# Altium PCB PCB_1.PcbDoc
Units mm, origin at the board's own origin, x right, y up, seen from the top; angles counter-clockwise.
Board outline 96.52 x 53.34 mm, 2 copper layers (Top Layer, Bottom Layer); 47 components, 44 nets, 157 pads, 56 vias.
Unrouted connection lines stored in the file: 1.
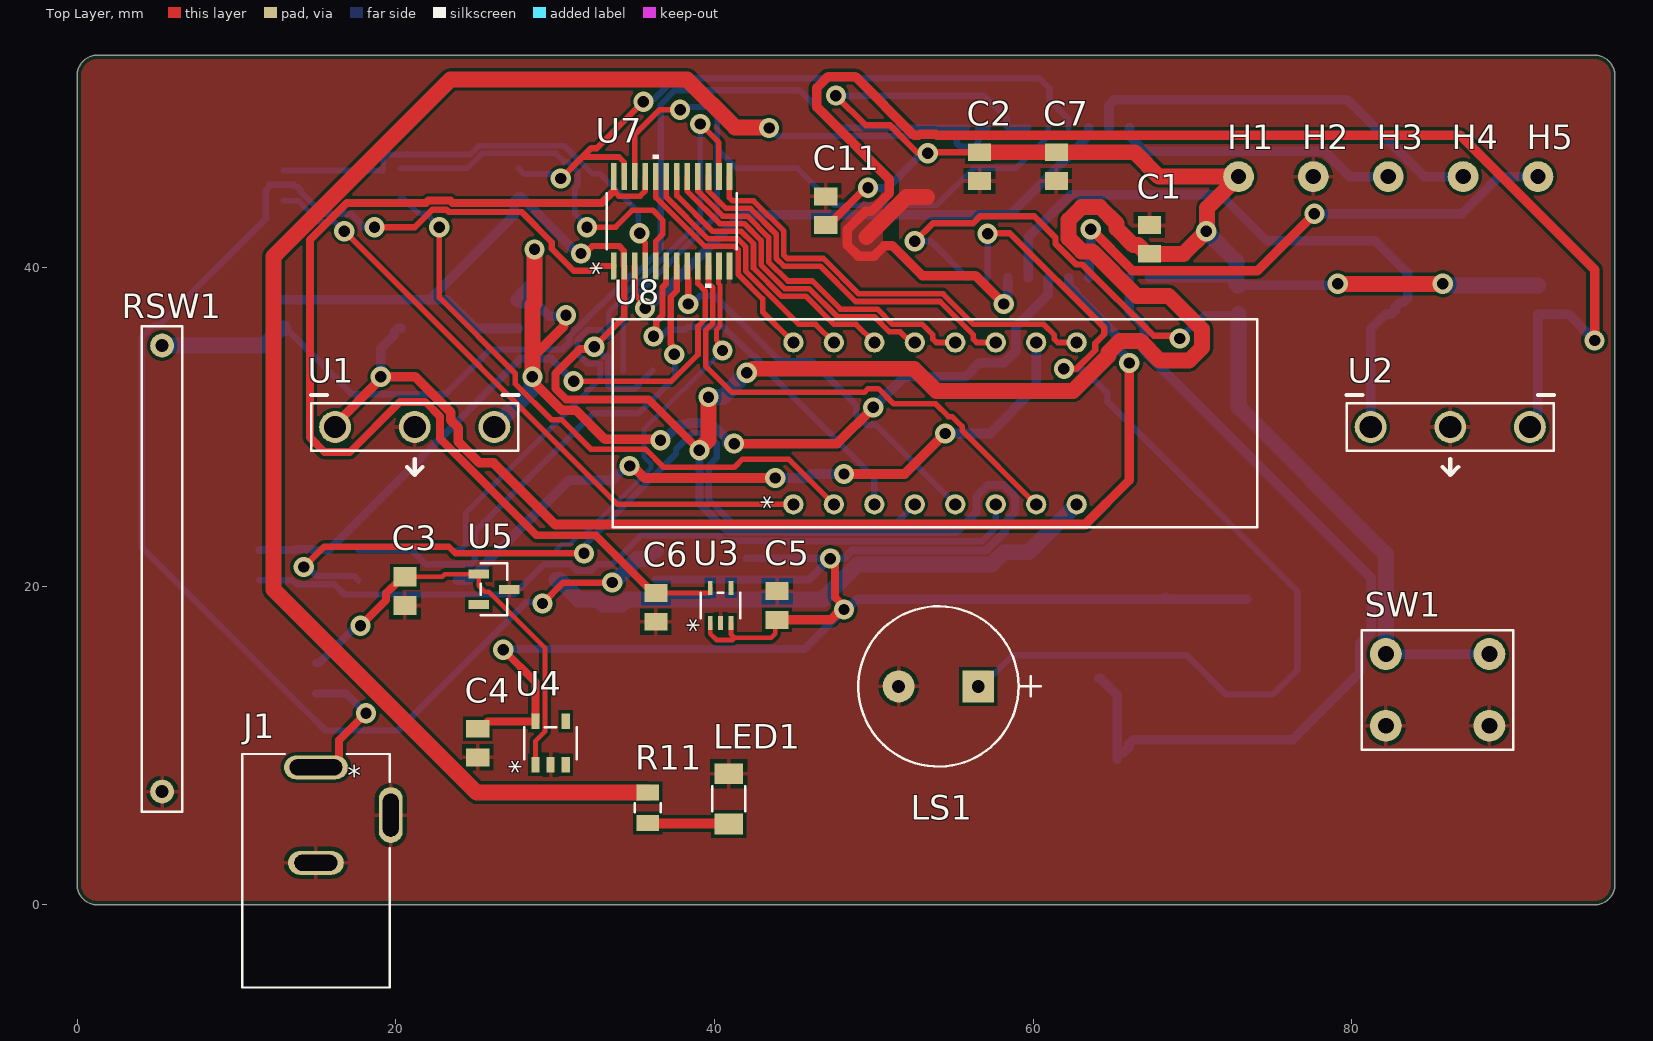
[diagram p0: Top Layer view]
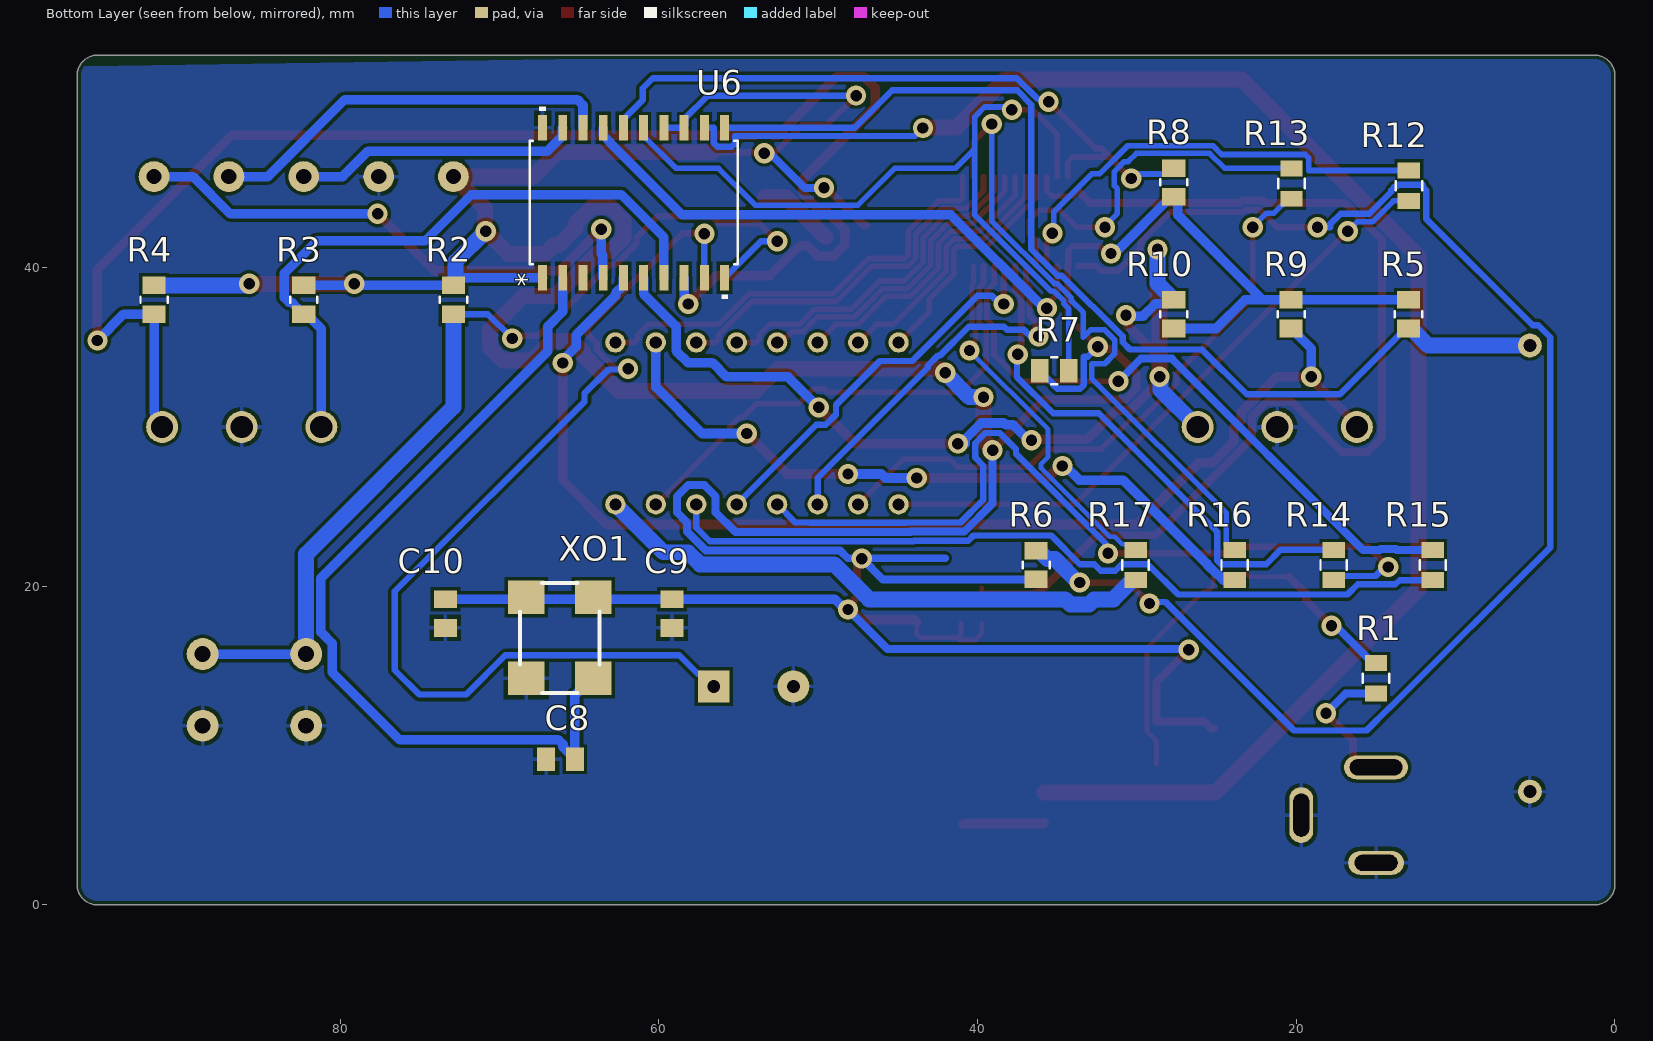
[diagram p1: Bottom Layer view, seen from below]
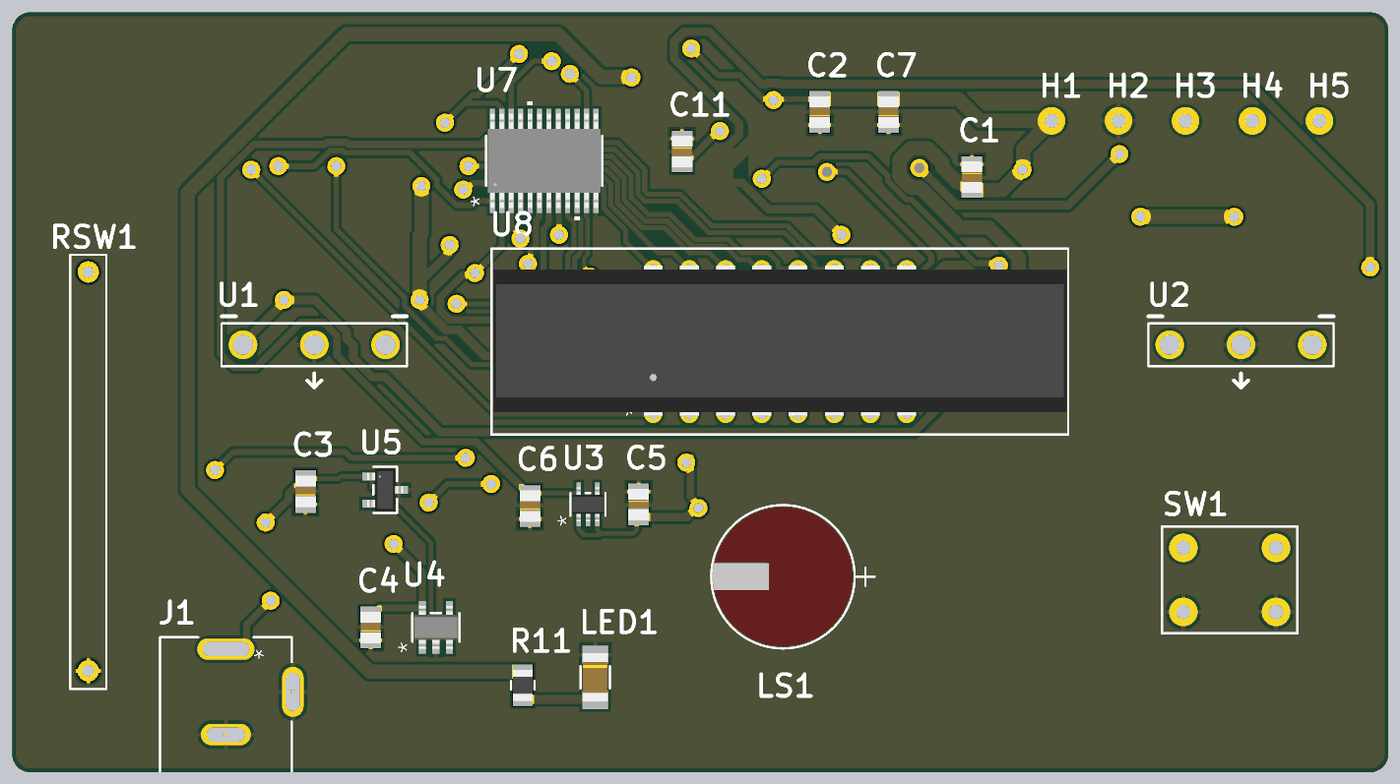
[diagram p2: 3D render of the assembled board from above, using the file's embedded part models]
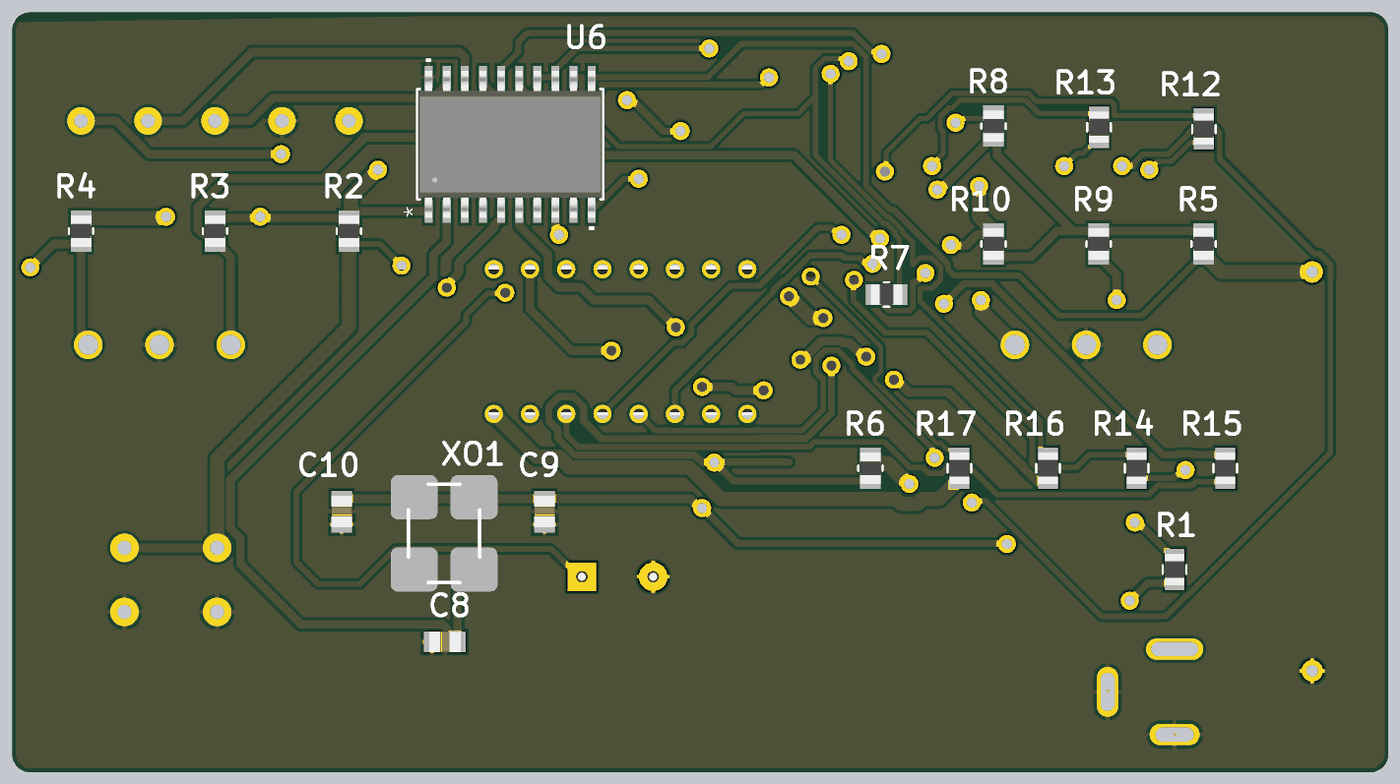
[diagram p3: 3D render of the assembled board from below, using the file's embedded part models]

## Layer stack, top to bottom
Top Solder: solder mask 0.0102, Solder Resist, Dk 3.5
Top Layer: signal copper 0.0356
Dielectric 1: dielectric 0.32, FR-4, Dk 4.8
Bottom Layer: signal copper 0.0356
Bottom Solder: solder mask 0.0102, Solder Resist, Dk 3.5

## Board outline
0,1.27 ccw(c1.27,1.27) 1.27,0 95.25,0 ccw(c95.25,1.27) 96.52,1.27 96.52,52.07 ccw(c95.25,52.07) 95.25,53.34 1.27,53.34 ccw(c1.27,52.07) 0,52.07

## Design rules (kind name [scope] priority, off if disabled: settings)
AssemblyTestpoint [All] p1: testpointundercomponent=TRUE minsize=1.016 maxsize=2.54 preferedsize=1.524 minholesize=0 maxholesize=1.016 preferedholesize=0.813 testpointgrid=0.025 usegrid=TRUE gridoriginx=25.4 gridoriginy=25.4 gridtolerance=0 allowsidetop=TRUE allowsidebottom=TRUE
BoardOutlineClearance [All] p1: gap=0.254 ignorepadtopadclearanceinfootprint=FALSE except(0: Arc-SplitContinuation Track-SplitContinuation SMDPad-SplitContinuation THPad-SplitContinuation Via-SplitContinuation Fill-SplitContinuation Poly-SplitContinuation Region-SplitContinuation Text-SplitContinuation; 0.3: Track-OutlineEdge)
Clearance [All] p1: gap=0.2 ignorepadtopadclearanceinfootprint=TRUE except(0: Text-Text; 0.127: Arc-Arc Arc-Track Arc-Region Track-Track Track-Region SMDPad-SMDPad SMDPad-Region THPad-Region Via-Region Fill-Region Poly-Region Region-Region; 0.15: Arc-Text Track-Text SMDPad-Text THPad-Text Via-Text Fill-Text Poly-Text Region-Text; 0.254: Arc-Via Arc-Hole Track-Via Track-Hole SMDPad-Via SMDPad-Hole THPad-Via THPad-Hole Via-Via Via-Hole Fill-Hole Poly-Hole Region-Hole Text-Hole Hole-Hole; 0.33: Arc-THPad Track-THPad SMDPad-THPad; 0.5: THPad-THPad)
DiffPairsRouting [All] p1: maxlimit=0.5 minlimit=0.127 mostfreqgap=0.254 toplayer_minwidth=0.381 toplayer_maxwidth=0.381 toplayer_prefwidth=0.381 bottomlayer_minwidth=0.381 bottomlayer_maxwidth=0.381 bottomlayer_prefwidth=0.381 maxuncoupledlength=12.7
FabricationTestpoint [All] p1: side=3 testpointundercomponent=TRUE minsize=1.016 maxsize=2.54 preferedsize=1.524 minholesize=0 maxholesize=1.016 preferedholesize=0.813 testpointgrid=0.025 allowsidetop=TRUE allowsidebottom=TRUE usegrid=TRUE gridoriginx=25.4 gridoriginy=25.4 gridtolerance=0
HoleSize "Via Hole Size" [IsVia] p1: absolutevalues=TRUE maxlimit=6.35 minlimit=0.3 maxpercent=80.000 minpercent=20.000
HoleSize [All] p2: absolutevalues=TRUE maxlimit=6.35 minlimit=0.2 maxpercent=80.000 minpercent=20.000
HoleToHoleClearance [All] p1: gap=0.5 allowstackedmicrovias=TRUE
MaximumViaCount [IsBlindVia] p1: limit=0
MinimumAnnularRing [All] p1: minimumring=0.25
PasteMaskExpansion [All] p1: expansion=0.5
PlaneClearance [All] p1: clearance=0.2
PolygonConnect [All] p1: connectstyle=Relief reliefconductorwidth=0.254 reliefentries=4 polygonreliefangle="90 Angle" airgapwidth=0.254
RoutingVias RoutingVias_1 [All] p1: holewidth=0.711 width=1.27 viastyle="Through Hole" minholewidth=0.3 minwidth=0.5 maxholewidth=5 maxwidth=20
RoutingVias [All] p2: holewidth=0.711 width=1.27 viastyle="Through Hole" minholewidth=0.711 minwidth=1.27 maxholewidth=0.711 maxwidth=1.27
SilkToSilkClearance [All] p1: silktosilkclearance=0
SilkToSolderMaskClearance [IsPad] p1: minsilkscreentomaskgap=0.15 clearancetoexposedcopper=TRUE
SolderMaskExpansion [All] p1: expansion=0.102 istentingtop=FALSE
SupplyNets "Schematic Supply Nets_2" [InNet('VDDIO2')] p1: voltage=0.000
SupplyNets "Schematic Supply Nets_1" [InNet('GND')] p2: voltage=0.000
SupplyNets "Schematic Supply Nets" [InNet('+2')] p3: voltage=0.000
ViasUnderSMD [All] p1: allowed=FALSE
Width [All] p1: maxlimit=20 minlimit=0.127 preferedwidth=0.6 minimp=50.000000 maximp=50.000000 favimp=50.000000
21 further rules are at their usual default settings.

## Components (designator, comment, footprint, x,y, rotation, side; value= is the part's Value field where it differs from the comment)
C1 "100nF" 0805_AVX 67.31,41.77 r270 top
C2 "100nF" 0805_AVX 56.642,46.342 r90 top
C3 "4.7uF" CAP_08051A0R8CAT2A_AVX 20.574,19.698 r90 top
C4 "100nF" 0805_AVX 25.146,10.16 r90 top
C5 "100nF" 0805_AVX 43.942,18.796 r270 top
C6 "100nF" 0805_AVX 36.322,18.682 r90 top
C7 "100nF" 0805_AVX 61.468,46.342 r90 top
C8 "100nF" 0805_AVX 66.18,9.144 r180 bottom
C9 "100nF" 0805_AVX 59.182,18.288 r90 bottom
C10 "100nF" 0805_AVX 73.406,18.288 r90 bottom
C11 "100nF" 0805_AVX 46.99,43.574 r270 top
H1 "Output" "1 pin header" 72.898,45.72 r0 top locked
H2 "Output" "1 pin header" 77.597,45.72 r0 top locked
H3 "Output" "1 pin header" 82.296,45.72 r0 top locked
H4 "Output" "1 pin header" 86.995,45.72 r0 top locked
H5 "Output" "1 pin header" 91.694,45.72 r0 top locked
J1 "PJ-002A" PJ-002A_CUD 14.986,2.146 r180 top
LED1 "156120VS75300" LED_VS75300_WRE 40.894,6.655 r270 top
LS1 "2.7kHz" CMI-9605IC_CUD 56.562,13.716 r180 top
R1 "100R" 0805_VIS 14.986,14.224 r90 bottom
R2 "4.7K" RES_1220_SUS 72.898,37.986 r90 bottom
R3 "4.7K" RES_1220_SUS 82.296,37.986 r90 bottom
R4 "4.7K" RES_1220_SUS 91.694,37.986 r90 bottom
R5 "4.7K" RES_1220_SUS 12.954,37.084 r90 bottom
R6 "4.7K" RES_1220_SUS 36.322,21.336 r270 bottom
R7 "4.7K" RES_1220_SUS 35.192,33.528 r0 bottom
R8 "4.7K" RES_1220_SUS 27.686,45.353 r270 bottom
R9 "4.7K" RES_1220_SUS 20.32,37.084 r90 bottom
R10 "4.7K" RES_1220_SUS 27.686,37.084 r270 bottom
R11 "100R" 0805_VIS 35.814,6.096 r270 top
R12 "100R" 0805_VIS 12.929,45.148 r270 bottom
R13 "100R" 0805_VIS 20.295,45.276 r270 bottom
R14 "100R" 0805_VIS 17.647,21.336 r270 bottom
R15 "100R" 0805_VIS 11.43,21.336 r270 bottom
R16 "100R" 0805_VIS 23.863,21.336 r90 bottom
R17 "100R" 0805_VIS 30.08,21.336 r270 bottom
RSW1 "10-15AT" GP56010-15 5.334,7.112 r90 top
SW1 "TS02-66-160-BK-100-LCR-D" TS02-66-160-BK-100-LCR-D 88.646,15.748 r180 top
U1 "Encoder" 288T232R161A1 16.19,30 r0 top locked
U2 "Encoder" 288T232R161A1 81.19,30 r0 top locked
U3 "2V LDO" SC-70_C5_MCH 40.386,18.796 r90 top
U4 "5V LDO" SOT-23-5-DBV_TEX 29.718,10.16 r90 top
U5 "MMBZ16VAT-QR" SOT_SM712 26.162,19.812 r270 top
U6 "MCU" SOIC20_SO_MCH 61.595,44.082 r90 bottom
U7 "IO Expander" TSSOP24_4P5X7P9_NXP 37.313,42.913 r90 top
U8 "LED Display" TDCG1060M_VIS 53.848,30.226 r90 top locked
XO1 "64MHz" CB3-3C-64M0000 68.326,19.304 r270 bottom

## Footprints (in the part's own frame and the unit in brackets; to place one, negate y for a bottom-side part, rotate by r counter-clockwise, add the part's x,y. Pads: shape width x height; smd on the part's side, far side on the other; paste and mask are expansions set on the pad)
"1 pin header" [mil]
  round 76 / inner rect 70.87x78.74 / far side round 76 hole 38 mask+0: 1(0,0)
288T232R161A1 [mm]
  round 2 hole 1.4 mask+0: A(0,0) B(10,0) C(5,0)
  silkscreen extent -1.5,-3 11.5,2
0805_AVX [mil]
  rect 44x57 smd paste+0 mask+3: 1(-35.5,0) 2(35.5,0)
  body extent -44,-29 44,29, height 37
0805_VIS [mm]
  rect 1x1.4 smd paste+0 mask+0.076: 1(-0.952,0) 2(0.952,0)
  silkscreen extent -0.29,-0.83 0.29,0.83, body extent -1.1,-0.7 1.1,0.7, height 0.84
CAP_08051A0R8CAT2A_AVX [mil]
  rect 47.24x57 smd paste+0 mask+3: 1(-35.5,0) 2(35.5,0)
  body extent -44,-29 44,29, height 37
CB3-3C-64M0000 [mm]
  rect 2.1x2.3 smd mask+0.076: 1(0,0) 2(5.08,0) 3(5.08,4.2) 4(0,4.2)
  silkscreen extent -0.9,-0.4 6,4.6
CMI-9605IC_CUD [mil]
  rect 79x79 / inner round 60 / far side rect 79x79 hole 32 paste-99999 mask+5: 1(0,0)
  round 79 / inner round 60 / far side round 79 hole 32 paste-99999 mask+5: 2(196.85,0)
  silkscreen extent -155,-198 296,198, body extent -95,-193 292,193, height 188
GP56010-15 [mm]
  round 1.5 hole 0.813 mask+0.127: 1(0,0) 2(28,0)
  silkscreen extent -1.27,-1.27 29.21,1.27
LED_VS75300_WRE [mil]
  rect 51.18x71 smd paste+0 mask+0: 1(-62,0) 2(62,0)
  silkscreen extent -31,-41 31,41, body extent -67,-36 67,36, height 55
PJ-002A_CUD [mil]
  oval 158x59 hole 39.37 slot 129.92 at 0 deg paste-99999 mask+0: 1(0,-255.5)
  oval 138x59 hole 39.37 slot 106.3 at 0 deg paste-99999 mask+0: 2(0,-19.5)
  oval 59x138 hole 39.37 slot 106.3 at 90 deg paste-99999 mask+0: 3(-185,-137.5)
  silkscreen extent -182,-288 182,288
RES_1220_SUS [mm]
  rect 1.1x1.45 smd paste+0 mask+0: 1(-0.902,0) 2(0.902,0)
  silkscreen extent -0.19,-0.85 0.19,0.85, body extent -1.1,-0.72 1.1,0.72, height 0.7
SC-70_C5_MCH [mil]
  rect 34.5x12 smd paste+0 mask+0: 1(-43.75,25.59) 2(-43.75,0) 3(-43.75,-25.59) 4(43.75,-25.59) 5(43.75,25.59)
  silkscreen extent -32,-48 32,48, body extent -47,-44 47,44, height 43
SOIC20_SO_MCH [mil]
  rect 63x22 smd paste+0 mask+0: 1(-185.5,225) 2(-185.5,175) 3(-185.5,125) 4(-185.5,75) 5(-185.5,25) 6(-185.5,-25) 7(-185.5,-75) 8(-185.5,-125) 9(-185.5,-175) 10(-185.5,-225) 11(185.5,-225) 12(185.5,-175) 13(185.5,-125) 14(185.5,-75) 15(185.5,-25) 16(185.5,25) 17(185.5,75) 18(185.5,125) 19(185.5,175) 20(185.5,225)
  silkscreen extent -237,-257 237,257, body extent -203,-252 203,252, height 104
SOT-23-5-DBV_TEX [mil]
  rect 38.5x20 smd paste+0 mask+0: 1(-53.75,37.4) 2(-53.75,0) 3(-53.75,-37.4) 4(53.75,-37.4) 5(53.75,37.4)
  silkscreen extent -40,-65 40,65, body extent -59,-60 59,60, height 43
SOT_SM712 [mil]
  rect 22x51 smd paste+0 mask+0: 1(-37.4,-37.5) 2(37.4,-37.5) 3(0,37.5)
  silkscreen extent -64,-33 64,33, body extent -59,-49 59,49, height 46
TDCG1060M_VIS [mil]
  round 50 / inner round 60 / far side round 50 hole 30 paste-99999 mask+0: 1(-200,350) 2(-200,250) 3(-200,150) 4(-200,50) 5(-200,-50) 6(-200,-150) 7(-200,-250) 8(-200,-350) 9(200,-350) 10(200,-250) 11(200,-150) 12(200,-50) 13(200,50) 14(200,150) 15(200,250) 16(200,350)
  silkscreen extent -257,-796 257,796, body extent -205,-791 210,791, height 281
TS02-66-160-BK-100-LCR-D [mm] "Push button"
  round 2 hole 1 mask+0: 1(0,0) 1(6.5,0) 2(0,4.5) 2(6.5,4.5)
  silkscreen extent -1.5,-1.5 8,6
TSSOP24_4P5X7P9_NXP [mil]
  rect 67x14 smd paste+0 mask+0: 1(-110.5,143) 2(-110.5,117) 3(-110.5,91) 4(-110.5,65) 5(-110.5,39) 6(-110.5,13) 7(-110.5,-13) 8(-110.5,-39) 9(-110.5,-65) 10(-110.5,-91) 11(-110.5,-117) 12(-110.5,-143) 13(110.5,-143) 14(110.5,-117) 15(110.5,-91) 16(110.5,-65) 17(110.5,-39) 18(110.5,-13) 19(110.5,13) 20(110.5,39) 21(110.5,65) 22(110.5,91) 23(110.5,117) 24(110.5,143)
  silkscreen extent -164,-160 164,160, body extent -130,-156 130,156, height 43

## Part data
C1 C2 C4 C5 C6 C7 C8 C9 C10 C11: library part 08051C103JAT2A, Mfr_Name="KYOCERA AVX"
C3: library part 08053C472K4Z2A, Mfr_Name="KYOCERA AVX"
H1 H2 H3 H4 H5: library part "1 pin header"
J1: "DC power plug", Mfr_Name="CUI Devices", RefDes=RefDes, Type=Type
LED1: "LED", Mfr_Name="Wurth Electronics"
LS1: library part CMI-9605IC-0380T, "Buzzer", Mfr_Name="CUI Devices", RefDes=RefDes, Type=Type
R1 R11 R12 R13 R14 R15 R16 R17: library part RCG080510R0FKEA, Mfr_Name=Vishay
R2 R3 R4 R5 R6 R7 R8 R9 R10: library part RG2012P-472-B-T5, Mfr_Name=Susumu
RSW1: library part GP56010-15, "Reed switch"
SW1: "Push button"
U1 U2: library part 288T232R161A1, "2b Encoder"
U3: library part MIC5365-2.0YC5-TR, Mfr_Name=Microchip, RefDes=RefDes, Type=Type
U4: library part TPS7B92050DBVR, Mfr_Name="Texas Instruments", RefDes=RefDes, Type=Type
U5: "13V TVS", Mfr_Name="Bourns Electronics", RefDes=RefDes, Type=Type
U6: library part PIC18F15Q20T-ISO, "PIC MCU", Mfr_Name=Microchip, RefDes=RefDes, Type=Type
U7: library part PCAL6416APW, "16 I/O expander", Mfr_Name=NXP, RefDes=RefDes, Type=Type
U8: library part TDCR1060M, "4 digit LED display", Mfr_Name=Vishay, RefDes=RefDes, Type=Type
XO1: library part CB3-3C-64M0000, "64MHz Clock"

## Via types
v1: diameter 1.27, hole 0.711, Top Layer to Bottom Layer, 56 vias

## Nets (pads, with @x,y where several pads share a name; then routed paths per layer and width w, separated by ;. In a path a pad name is that pad's centre, name@x,y a point inside that pad or via, vN(x,y) a via of type N, cw(c..) or ccw(c..) an arc to the next point about the centre after c; other vN are vias at no path point)
+2: C6.2 U3.5 U7.21 U7.24 | length 68.9
  Top Layer w0.3: C6.2 39.698,19.583 39.736,19.621 U3.5
  Top Layer w0.35: 33.683,44.819 34.008,44.494 35.334,44.494 35.659,44.819 35.659,45.717 U7.21
  Top Layer w0.5: 33.683,44.819 32.934,44.069 23.565,44.069 23.423,44.211 22.043,44.211 21.901,44.069 16.931,44.069 14.61,41.748 14.61,29.346 15.536,28.42 17.11,28.42 20.27,31.58 21.844,31.58 22.77,30.654 22.77,29.271 28.837,23.204 32.536,23.204 36.157,19.583 C6.2
BUZ: LS1.1 U6.9 | length 64.8
  Top Layer w0.4: v1(57.15,42.134) 57.18,42.164 58.547,42.164 64.464,36.247 64.464,35.816 63.903,35.255 63.903,34.823 62.728,33.649 61.94,33.649 v1(61.937,33.652)
  Bottom Layer w0.4: LS1.1 57.365,14.519 57.572,14.519 58.727,15.674 69.642,15.674 72.108,13.208 75.057,13.208 76.581,14.732 76.581,19.685 64.672,31.594 64.672,32.109 63.172,33.61 61.979,33.61 v1(61.937,33.652) ; U6.9 v1(57.15,42.134)
ENA1: R9.1 U1.A U6.5 | length 75.1
  Top Layer w0.6: U1.A 16.19,30.143 19.05,33.003 v1(19.05,33.147) 21.235,33.147 23.447,30.935 23.447,30.438 23.933,29.952 23.933,29.065 25.255,27.743 26.142,27.743 30.004,23.881 63.262,23.881 66.038,26.657 v1(66.038,34.014)
  Bottom Layer w0.6: v1(19.05,33.147) 19.05,34.912 19.895,35.757 19.895,35.932 20.145,36.182 R9.1 ; U6.5 62.23,38.89 62.721,38.4 62.721,38.244 65.197,35.768 65.197,35.036 66.038,34.195 v1(66.038,34.014)
ENA2: R3.1 U2.A U6.7 | length 40.2
  Bottom Layer w0.6: U6.7 59.69,41.91 62.357,44.577 71.785,44.577 74.671,41.691 81.474,41.691 83.521,39.644 83.521,38.13 83.228,37.837 83.072,37.837 82.721,37.486 82.721,37.334 82.471,37.084 R3.1 ; U2.A 81.19,36.153 R3.1@82.121,37.084
ENB1: R10.1 U1.B U6.6 | length 63.3
  Top Layer w0.6: v1@28.575,32.895 30.409,31.061 31.296,31.061 33.14,29.217 36.568,29.217 v1(36.618,29.168) ; 28.575,34.363 30.552,36.34 30.552,36.883 v1(30.68,37.011) ; v1(41.236,28.956) 47.699,28.956 v1(49.974,31.231)
  Top Layer w1: v1(28.575,33.147) 28.575,34.363 28.575,37.655 28.702,37.782 v1(28.702,41.148)
  Bottom Layer w0.6: R10.1 27.936,37.736 28.834,37.736 29.611,36.958 30.68,36.958 v1(30.68,37.011) ; v1(36.618,29.168) 36.799,29.168 37.774,30.143 38.238,30.143 38.347,30.252 39.769,30.252 40.774,29.247 v1@40.774,28.956 ; v1(49.974,31.231) 51.889,33.147 55.753,33.147 56.647,34.041 58.182,34.041 58.923,34.782 58.923,36.317 60.96,38.354 U6.6
  Bottom Layer w1: U1.B 28.523,32.333 28.523,33.095 v1(28.575,33.147) ; R10.1 27.861,37.986 27.911,38.036 27.911,38.211 28.702,39.002 v1(28.702,41.148)
ENB2: R4.1 U2.B U6.8 | length 96.9
  Top Layer w0.6: v1(58.166,37.719) 56.38,39.505 53.047,39.505 51.176,41.377 50.678,41.377 50.022,40.721 49.038,40.721 48.341,41.418 48.341,42.402 49.476,43.537 49.846,43.537 50.981,44.672 50.981,45.539 46.436,50.084 46.436,51.292 47.133,51.989 48.849,51.989 52.535,48.303 52.84,48.303 52.904,48.366 53.897,48.366 53.961,48.303 86.825,48.303 95.25,39.878 v1(95.25,35.433)
  Bottom Layer w0.6: v1(58.166,37.719) 58.42,37.973 U6.8 ; U2.B 91.19,30.379 91.694,30.883 R4.1 93.599,37.084 v1(95.25,35.433)
GND: C1.1 C2.1 C3.1 C4.1 C5.1 C6.1 C7.1 C8.1 C9.1 C10.1 C11.1 H2.1 J1.2 J1.3 LED1.1 LS1.2 RSW1.1 SW1.2 U1.C U2.C U3.2 U4.2 U5.3 U6.20 U7.12 XO1.2 | length 4.9
  Top Layer w1: 49.53,41.91 52.07,44.45 53.34,44.45
LED1: R11.1 U6.12 | length 102.2
  Top Layer w1: R11.1 25.084,7.048 12.319,19.813 12.319,40.697 23.43,51.808 38.294,51.808 41.299,48.803 43.399,48.803 v1(43.434,48.768)
  Bottom Layer w0.4: v1(43.434,48.768) 43.936,48.266 55.201,48.266 55.201,47.828 55.435,47.593 56.325,47.593 56.559,47.828 56.559,48.793 U6.12
NetC3_2: C3.2 R1.2 U4.1 U5.1 | length 26.9
  Top Layer w0.3: C3.2@20.45,20.599 C3.2 22.913,20.599 23.076,20.762 U5.1 25.209,20.033 25.583,19.659 25.834,19.659 29.372,16.122 29.372,10.891 28.768,10.287 U4.1
  Top Layer w0.5: v1(17.78,17.526) 19.4,19.146 19.4,19.582 19.714,19.896 19.747,19.896 C3.2@20.45,20.599
  Bottom Layer w0.5: R1.2 15.186,15.176 17.389,17.379 17.633,17.379 v1(17.78,17.526)
NetH3_1: H3.1 U6.19 | length 17.8
  Bottom Layer w0.6: U6.19 66.061,48.773 66.061,48.256 67.002,47.315 78.258,47.315 79.853,45.72 H3.1
NetH4_1: H4.1 U6.18 | length 25.8
  Bottom Layer w0.6: U6.18 64.77,50.195 65.121,50.546 79.726,50.546 84.552,45.72 H4.1
NetH5_1: H5.1 U6.4 | length 34.7
  Top Layer w0.6: v1(63.627,42.418) 66.235,39.81 74.081,39.81 v1(77.66,43.388)
  Bottom Layer w0.6: U6.4 63.521,39.391 63.521,40.777 63.627,40.883 v1(63.627,42.418) ; v1(77.66,43.388) 86.919,43.388 89.251,45.72 H5.1
NetJ1_1: J1.1 R1.1 | length 8.9
  Top Layer w0.5: J1.1 15.973,8.636 16.434,9.097 16.434,10.338 v1(18.132,12.036)
  Bottom Layer w0.5: R1.1 16.895,13.272 v1(18.132,12.036)
NetLED1_2: LED1.2 R11.2 | length 5.1
  Top Layer w0.6: R11.2 35.846,5.112 40.862,5.112 LED1.2
NetR6_1: R6.1 U7.1 | length 93.4
  Top Layer w0.4: v1(18.669,42.545) 21.193,42.545 22.282,43.634 23.184,43.634 23.326,43.492 27.898,43.492 29.791,41.599 29.791,41.186 31.172,39.805 32.264,39.805 32.566,40.107 U7.1 ; v1(29.21,18.923) 30.522,20.235 v1(33.594,20.235)
  Bottom Layer w0.4: v1(18.669,42.545) 17.853,42.545 17.853,42.742 17.215,43.38 15.421,43.38 14.029,44.772 14.029,44.862 13.795,45.096 13.705,45.096 13.602,45.199 12.063,45.199 12.063,45.096 11.829,44.862 11.829,43.058 5.163,36.392 4.804,36.392 4.054,35.642 4.054,34.582 4.059,34.577 4.059,22.434 14.12,12.372 14.16,12.372 15.585,10.947 20.138,10.947 28.209,19.018 29.115,19.018 v1(29.21,18.923)
  Bottom Layer w1: v1(33.594,20.235) 33.667,20.235 35.133,21.701 35.61,21.701 36.147,22.238 R6.1
NetR12_2: R12.2 U8.1 | length 39.9
  Top Layer w0.35: v1(16.764,42.291) 33.909,25.146 U8.1
  Bottom Layer w0.35: R12.2 13.895,44.196 15.213,42.878 16.177,42.878 v1(16.764,42.291)
NetR13_2: R13.2 U8.2 | length 38.5
  Top Layer w0.35: v1(22.733,42.545) 22.733,38.119 27.511,33.341 27.511,32.706 29.758,30.459 30.393,30.459 32.237,28.615 35.665,28.615 36.809,27.472 41.256,27.472 41.773,27.988 44.656,27.988 U8.2
  Bottom Layer w0.35: R13.2 20.495,44.325 21.397,43.423 21.855,43.423 v1(22.733,42.545)
NetR14_2: R14.2 U8.4 | length 52
  Top Layer w0.4: v1(14.224,21.209) 15.494,22.479 23.33,22.479 23.744,22.065 v1(31.816,22.065)
  Bottom Layer w0.4: v1(14.224,21.209) 14.459,21.209 15.021,20.647 17.384,20.647 R14.2 ; v1(31.816,22.065) 31.982,22.231 31.982,22.711 37.592,28.321 37.592,28.61 38.607,29.625 39.509,29.625 40.147,28.987 40.147,28.085 39.635,27.573 39.635,25.443 41.075,24.003 44.453,24.003 44.475,23.981 50.521,23.981 50.543,24.003 51.435,24.003 U8.4
NetR15_2: R15.2 U8.6 | length 50.4
  Bottom Layer w0.4: R15.2 13.509,20.384 13.773,20.12 16.145,20.12 16.781,19.484 27.415,19.484 29.318,21.388 30.953,21.388 31.365,20.976 32.267,20.976 32.678,21.388 33.577,21.388 35.377,23.188 40.258,23.188 40.597,22.849 43.975,22.849 43.997,22.827 56.809,22.827 57.658,23.676 U8.6
NetR16_1: R16.1 U8.10 | length 44.8
  Top Layer w0.6: v1(34.679,27.551) 34.86,27.551 35.614,26.797 v1(43.815,26.797) ; v1(48.133,27.051) 51.943,27.051 v1(54.483,29.591)
  Bottom Layer w0.6: R16.1 24.575,20.384 24.952,20.761 24.989,20.761 25.59,21.362 25.59,21.399 30.861,26.67 33.616,26.67 34.497,27.551 v1(34.679,27.551) ; v1(43.815,26.797) 45.783,26.797 46.037,27.051 v1(48.133,27.051) ; v1(54.483,29.591) 57.289,29.591 60.198,32.5 U8.10
NetR17_2: R17.2 U8.8 | length 35.9
  Bottom Layer w1: R17.2 30.28,20.384 31.48,19.184 32.68,19.184 33.018,18.846 34.169,18.846 34.508,19.184 46.811,19.184 49,21.373 57.411,21.373 58.178,22.139 59.731,22.139 U8.8
PIN1: R12.1 U7.4 | length 28.7
  Top Layer w0.35: v1(35.306,42.164) 35.306,41.915 35.662,41.559 U7.4
  Bottom Layer w0.35: R12.1 19.22,46.099 19.22,46.883 19.44,47.103 24.681,47.103 25.234,47.656 30.576,47.656 32.345,45.887 32.834,45.887 35.222,43.499 35.222,42.248 v1(35.306,42.164)
PIN2: R13.1 U7.5 | length 24.4
  Top Layer w0.35: v1(32.004,42.545) 33.796,42.545 34.86,43.609 36.128,43.609 36.751,42.986 36.751,42.097 36.322,41.668 U7.5
  Bottom Layer w0.35: R13.1 24.48,46.228 25.431,47.179 30.037,47.179 30.559,46.657 30.794,46.657 31.417,46.034 31.417,45.152 31.225,44.96 31.225,43.406 32.004,42.627 v1(32.004,42.545)
PIN3: U7.6 U8.3 | length 24.5
  Top Layer w0.4: v1(36.176,35.687) 36.342,35.853 36.342,36.61 36.738,37.006 36.738,38.769 36.96,38.992 36.96,40.084 U7.6
  Bottom Layer w0.4: v1(36.176,35.687) 36.684,35.687 37.09,36.092 38.141,36.092 38.341,36.292 40.559,36.292 42.361,34.49 42.488,34.49 43.126,33.852 43.126,33.725 50.038,26.813 U8.3
PIN4: R14.1 U7.7 | length 33.4
  Top Layer w0.4: v1(37.478,34.557) 37.312,34.724 37.312,35.18 37.265,35.227 37.265,38.173 37.643,38.551 U7.7
  Bottom Layer w0.4: R14.1 20.988,22.288 21.888,21.388 24.729,21.388 24.963,21.622 24.963,23.424 32.392,30.853 35.259,30.853 37.528,33.122 37.528,34.508 v1(37.478,34.557)
PIN5: U7.8 U8.5 | length 25.2
  Top Layer w0.4: U7.8 38.325,40.084 38.325,39.364 38.354,39.335 v1(38.354,37.719)
  Bottom Layer w0.4: v1(38.354,37.719) 38.589,37.719 39.097,38.227 40.014,38.227 44.1,34.141 46.123,34.141 48.885,31.379 48.885,30.78 49.522,30.142 50.122,30.142 U8.5
PIN6: R15.1 U7.9 | length 39.8
  Top Layer w0.35: v1(31.161,32.877) 37.303,32.877 38.972,34.546 38.972,36.32 39.418,36.767 39.418,38.541 38.964,38.995 U7.9
  Bottom Layer w0.5: R15.1 13.692,22.288 13.752,22.348 14.696,22.348 14.756,22.288 15.81,22.288 27.809,34.286 29.752,34.286 v1(31.161,32.877)
PIN7: U7.10 U8.7 | length 31.3
  Top Layer w0.35: U7.10 39.627,40.104 39.627,39.007 39.895,38.738 39.895,36.507 39.449,36.061 39.449,33.83 41.105,32.174 49.411,32.174 49.651,32.413 50.296,32.413 51.249,31.461 53.883,31.461 54.689,30.655 54.924,30.655 55.547,30.032 55.547,29.797 U8.7
PIN8: R17.1 U7.11 | length 23.3
  Top Layer w0.3: U7.11 40.258,40.08 40.258,39.015 40.347,38.926 40.347,36.32 40.132,36.105 40.132,35.441 40.513,35.06 v1(40.513,34.798)
  Bottom Layer w0.3: R17.1 30.43,22.638 30.919,22.638 31.385,23.104 31.7,23.104 36.024,27.427 36.024,27.676 35.579,28.12 35.579,29.864 v1(40.513,34.798)
PIN9: U7.13 U8.9 | length 27.9
  Top Layer w0.35: U7.13 40.945,44.4 41.15,44.194 42.463,44.194 44.36,42.298 44.36,40.78 44.565,40.575 46.841,40.575 49.062,38.354 54.357,38.354 56.265,36.446 60.67,36.446 61.338,35.778 61.338,35.511 61.543,35.306 U8.9
PIN10: R16.2 U7.14 | length 40.2
  Top Layer w0.35: v1(39.116,49.022) 40.284,47.854 U7.14
  Bottom Layer w0.35: R16.2 24.063,22.288 24.388,22.613 24.388,24.6 32.838,33.05 32.838,33.949 32.815,33.973 32.02,33.973 31.397,34.596 31.397,35.477 32.02,36.101 32.902,36.101 33.365,35.637 33.365,37.179 34.108,37.922 34.108,38.095 35.011,38.998 35.184,38.998 39.116,42.93 v1(39.116,49.022)
PIN11: U7.15 U8.11 | length 23.9
  Top Layer w0.35: U7.15 39.627,45.717 39.627,44.819 40.728,43.717 40.952,43.717 42.266,43.717 43.883,42.101 43.883,40.582 44.367,40.098 46.643,40.098 48.864,37.877 54.159,37.877 56.258,35.778 56.258,35.511 56.463,35.306 U8.11
PIN12: U7.16 U8.12 | length 22.1
  Top Layer w0.35: U7.16 38.966,45.717 38.966,44.804 40.53,43.24 40.755,43.24 42.068,43.24 43.406,41.903 43.406,40.365 44.609,39.162 46.147,39.162 47.909,37.4 50.231,37.4 51.185,36.446 53.05,36.446 53.718,35.778 53.718,35.511 53.923,35.306 U8.12
PIN13: U7.17 U8.13 | length 20
  Top Layer w0.35: U7.17 38.306,45.717 38.306,44.79 40.333,42.763 40.557,42.763 41.871,42.763 42.929,41.706 42.929,40.168 44.411,38.685 45.949,38.685 47.711,36.923 50.033,36.923 50.987,35.969 51.666,35.969 52.329,35.306 U8.13
PIN14: U7.18 U8.14 | length 18.3
  Top Layer w0.35: U7.18 37.646,45.717 37.646,44.523 39.883,42.286 40.36,42.286 41.673,42.286 42.452,41.508 42.452,39.97 44.214,38.208 45.752,38.208 47.514,36.446 48.898,36.446 U8.14
PIN15: U7.19 U8.15 | length 16.5
  Top Layer w0.35: U7.19 36.985,45.717 36.985,44.422 39.598,41.809 40.162,41.809 41.476,41.809 41.975,41.31 41.975,39.772 45.301,36.446 46.358,36.446 U8.15
PIN16: U7.20 U8.16 | length 15.1
  Top Layer w0.35: U7.20 36.325,45.717 36.325,44.408 39.4,41.333 39.964,41.333 41.278,41.332 41.498,41.113 41.498,39.575 43.03,38.043 43.03,37.368 43.03,37.234 U8.16
RST: U6.17 U7.3 | length 35.8
  Top Layer w0.4: U7.3 35.001,38.34 35.649,37.692 v1(35.649,37.457)
  Bottom Layer w0.6: v1(35.649,37.457) 35.822,37.457 41.689,43.323 54.207,43.323 58.547,43.323 63.055,47.832 63.055,47.869 63.5,48.314 U6.17
RSW: R5.1 RSW1.2 U6.11 | length 67.1
  Bottom Layer w0.4: R5.1 13.129,36.182 17.253,32.058 23.114,32.058 25.919,34.863 30.434,34.863 30.895,35.324 30.895,35.685 34.709,39.5 34.976,39.5 36.63,41.154 36.63,50.236 37.521,51.127 45.367,51.127 47.701,48.793 U6.11
  Bottom Layer w1: RSW1.2 11.709,35.112 12.779,36.182 R5.1
SCL: R7.1 U6.15 U7.22 | length 51.8
  Top Layer w0.35: U7.22 35.001,48.355 36.559,49.913 37.844,49.913 v1(37.846,49.911)
  Bottom Layer w0.35: R7.1 34.29,37.429 34.585,37.724 34.585,37.897 35.208,38.521 35.382,38.521 40.18,43.319 40.18,47.45 ; v1(37.846,49.911) 38.02,50.086 39.557,50.086 40.18,49.463 40.18,47.45 ; U6.15 60.96,48.273 58.915,46.228 56.261,46.228 53.958,43.925 47.515,43.925 45.212,46.228 41.402,46.228 40.18,47.45
SDA: R8.1 U6.16 U7.23 | length 43.1
  Top Layer w0.35: 31.706,46.946 34.014,46.946 34.338,46.621 34.338,45.723 U7.23
  Top Layer w0.4: v1(30.353,45.593) 31.706,46.946 32.258,47.498 32.62,47.498 v1(35.541,50.419)
  Bottom Layer w0.35: R8.1 28.061,45.879 29.818,45.879 30.104,45.593 v1(30.353,45.593)
  Bottom Layer w0.4: v1(35.541,50.419) 35.707,50.585 36.234,50.585 37.538,51.889 60.395,51.889 61.019,51.265 61.019,50.525 62.23,49.314 U6.16
SW1: R2.1 SW1.1 U6.10 | length 60.9
  Top Layer w0.4: v1(52.578,41.656) 53.721,42.799 56.245,42.799 56.669,43.223 60.071,43.223 61.411,41.883 61.411,41.5 62.709,40.202 63.092,40.202 67.568,35.726 69.049,35.726 v1(69.215,35.56)
  Bottom Layer w0.4: v1(52.578,41.656) 53.594,41.656 U6.10 ; v1(69.215,35.56) 70.739,37.084 R2.1
  Bottom Layer w0.6: SW1.1@82.146,15.748 SW1.1@88.646,15.748
  Bottom Layer w1: R2.1 72.898,31.263 82.146,22.015 SW1.1@82.146,15.748
VDDIO2: C1.2 C2.2 C4.2 C5.2 C7.2 C9.2 C10.2 C11.2 H1.1 R2.2 R3.2 R4.2 R5.2 R6.2 R7.2 R8.2 R9.2 R10.2 U3.1 U3.3 U4.5 U6.1 U6.13 U6.14 U7.2 XO1.1 XO1.4 | length 335.8
  Top Layer w0.3: U3.1 39.738,17.682 39.738,17.031 40.132,16.637 41.148,16.637 41.275,16.764 ; U3.3 41.038,17.682 41.038,17.001 41.275,16.764 ; C5.2@43.815,17.767 43.815,17.018 43.561,16.764 41.275,16.764
  Top Layer w0.4: v1(31.623,40.894) 31.858,40.894 32.322,41.357 34.024,41.357 34.319,41.063 34.319,40.129 U7.2 34.341,36.916 v1(32.461,35.037) ; v1(47.625,50.8) 49.492,48.933 51.018,48.933 52.707,47.244 ; v1@53.396,47.244 C2.2
  Top Layer w0.5: C4.2 25.311,11.062 25.775,11.525 U4.5 28.768,13.995 v1(26.747,16.016) ; v1(32.461,35.037) 32.314,34.889 31.562,34.889 30.022,33.349 30.022,32.406 30.689,31.738 35.855,31.738 v1(39.058,28.536) ; C11.2 47.155,42.672 49.494,45.011 v1(49.639,45.011) ; v1@47.574,22.056 47.574,19.309 48.133,18.75 v1(48.133,18.542)
  Top Layer w0.6: C5.2@43.815,17.767 C5.2 47.304,17.894 47.952,18.542 v1(48.133,18.542)
  Top Layer w1: v1(39.058,28.536) 39.058,28.609 39.624,29.175 v1(39.624,31.877) ; v1(42.037,33.401) 42.164,33.401 42.418,33.655 52.531,33.655 53.923,32.263 62.512,32.263 64.73,34.481 64.73,34.67 65.463,35.403 66.722,35.403 67.954,34.171 69.79,34.171 70.604,34.985 70.604,36.135 68.515,38.224 66.51,38.224 63.705,41.029 63.052,41.029 62.238,41.843 62.238,42.993 63.052,43.807 64.202,43.807 65.249,42.76 65.249,42.46 66.296,41.413 66.6,41.413 67.145,40.869 C1.2 69.444,40.869 v1(70.866,42.291) 70.918,42.343 70.918,43.74 H1.1 67.902,45.72 66.378,47.244 C7.2 C2.2 ; v1(79.121,38.989) v1(85.725,38.989)
  Bottom Layer w0.4: v1(32.461,35.037) 33.08,34.417 33.34,34.417 33.34,32.637 33.574,32.403 35.006,32.403 35.24,32.637 35.24,32.675 R7.2 ; v1(47.625,50.8) 56.934,50.8 58.341,49.394 58.341,48.873 U6.13 U6.14
  Bottom Layer w0.5: v1(26.747,16.016) 26.788,16.056 45.647,16.056 v1(48.133,18.542) ; R6.2 45.952,20.434 v1@47.256,21.738 ; v1(39.058,28.536) 39.058,25.204 40.836,23.426 44.214,23.426 44.236,23.404 55.204,23.404 56.443,24.643 56.443,25.649 57.155,26.361 58.161,26.361 58.873,25.649 58.873,24.643 58.235,24.005 58.235,23.437 57.048,22.25 48.636,22.25 48.146,21.76 42.037,21.76 ; v1(49.639,45.011) 49.661,44.989 50.831,44.989 52.872,47.03 53.249,47.03 v1(53.396,47.177)
  Bottom Layer w0.6: R5.2 R9.2 22.111,37.986 ; R8.2@27.432,44.201 27.432,43.307 22.111,37.986 ; R10.2 25.03,36.182 23.226,37.986 22.111,37.986 ; R8.2 27.861,44.451 31.29,41.022 31.495,41.022 v1(31.623,40.894) ; v1(48.133,18.542) 48.314,18.542 48.962,19.19 C9.2 68.212,19.19 XO1.1 68.44,19.19 C10.2 ; U6.1 72.24,39.37 R2.2@72.723,38.887 ; R2.2 R3.2
  Bottom Layer w1: v1(39.624,31.877) 40.513,31.877 v1(42.037,33.401) ; v1(70.866,42.291) 72.771,40.386 72.771,38.937 72.821,38.887 R2.2 ; v1(85.725,38.989) 85.798,38.989 85.9,38.887 R4.2
  other v1: 47.278,21.738
XTAL: C8.2 U6.2 XO1.3 | length 54.5
  Bottom Layer w0.6: XO1.3 64.226,14.224 65.278,13.172 65.278,9.568 C8.2@65.278,9.309 ; C8.2 C8.2@65.278,9.309 ; U6.2 66.04,37.246 66.975,36.311 66.975,34.758 81.219,20.514 81.219,17.126 80.516,16.423 80.516,14.603 76.281,10.368 66.315,10.368 66.023,10.075 66.023,9.919 65.671,9.568 65.537,9.568 C8.2@65.278,9.309
pads on no net: U3.4 U4.3 U4.4 U5.2 U6.3

## Polygon pours and split planes (outlines as drawn)
GND on Top Layer "GND_L01_P000" (solid, pour order 0): 0,53.34 0,0 96.52,0 96.52,53.34
GND on Bottom Layer "GND_L02_P001" (solid, pour order 1): 0,54.029 0,0 96.52,0 96.52,2.54 96.52,11.811 96.52,52.651

## Text inside footprints (layer, text, board x,y; h text height)
J1: Top Overlay "*" at 17.843,9.271 h1.27 r180; Mechanical 13 "*" at 17.843,9.271 h1.27 r180
U3: Top Overlay "*" at 39.558,17.113 h1.27 r90; Mechanical 13 "*" at 40.65,18.059 h1.27 r90
U4: Top Overlay "*" at 28.387,8.223 h1.27 r90; Mechanical 13 "*" at 29.479,9.22 h1.27 r90
U6: Mechanical 13 "*" at 66.65,40.399 h1.27 r270; Bottom Overlay "*" at 67.742,38.798 h1.27 r270
U7: Top Overlay "*" at 33.452,39.535 h1.27 r90; Mechanical 13 "*" at 34.709,40.729 h1.27 r90
U8: Top Overlay "*" at 44.196,24.828 h1.27 r90; Mechanical 13 "*" at 45.593,23.762 h1.27 r90